# Altium PCB PrNet_v04.PcbDoc
Units mil, origin at the board's own origin, x right, y up, seen from the top; angles counter-clockwise.
Board outline 1470 x 850 mil, 2 copper layers (Top Layer, Bottom Layer); 17 components, 14 nets, 77 pads, 12 vias.
Unrouted connection lines stored in the file: 3.
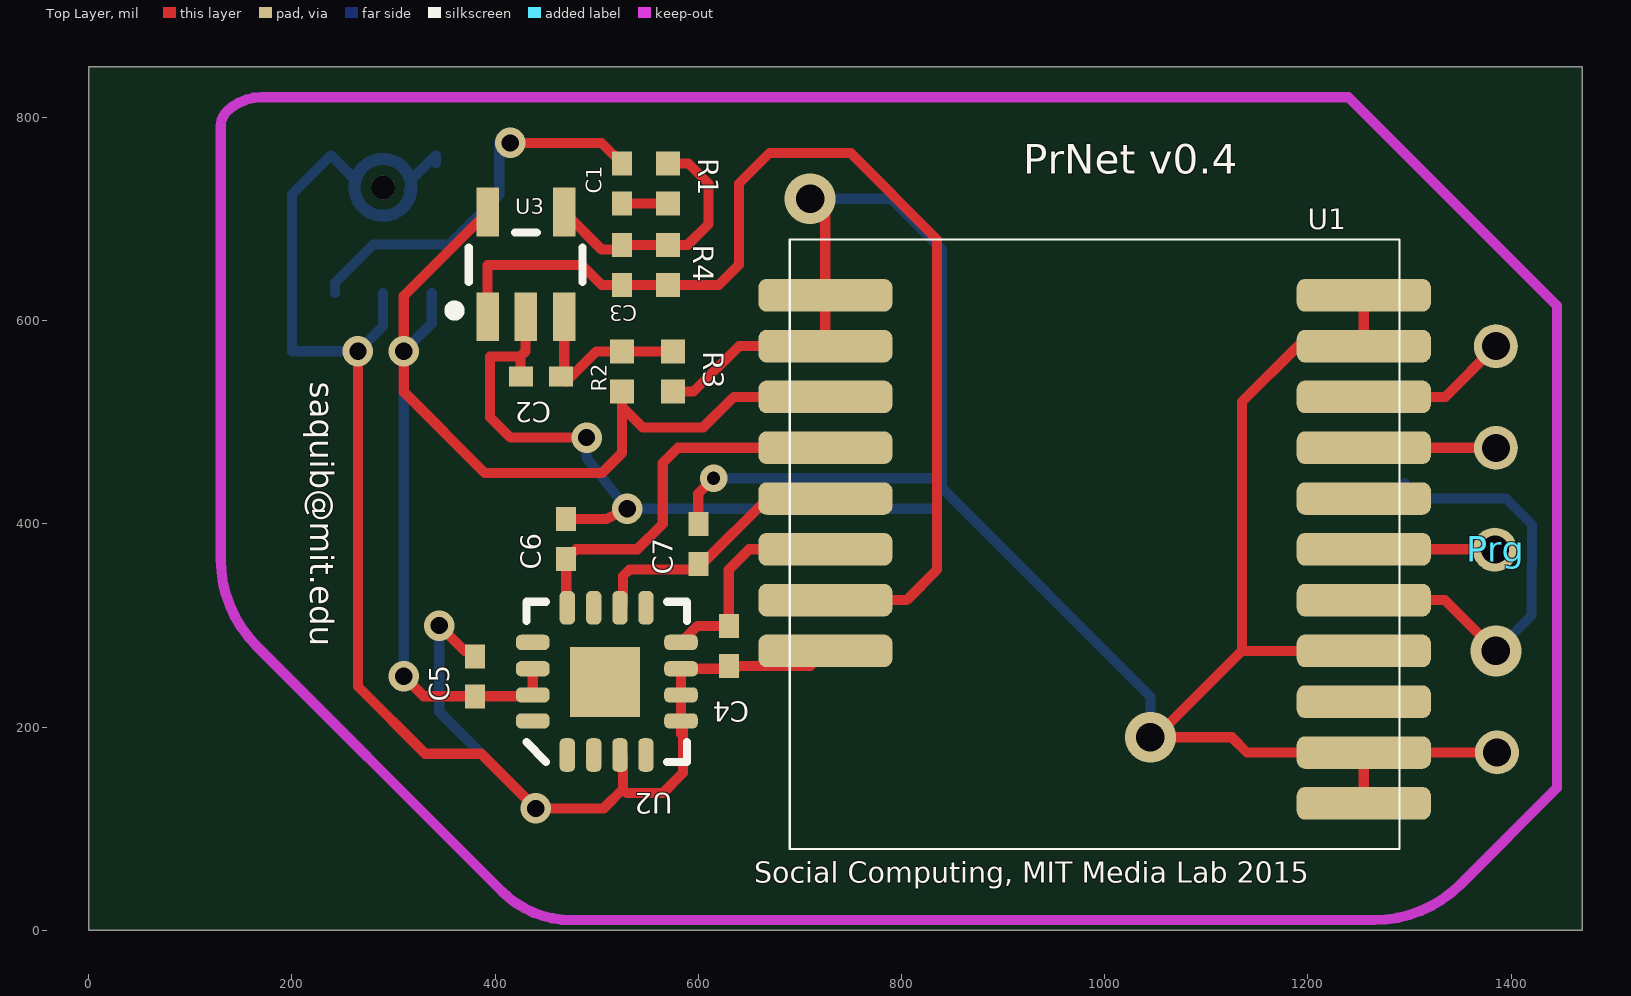
[diagram p0: Top Layer view]
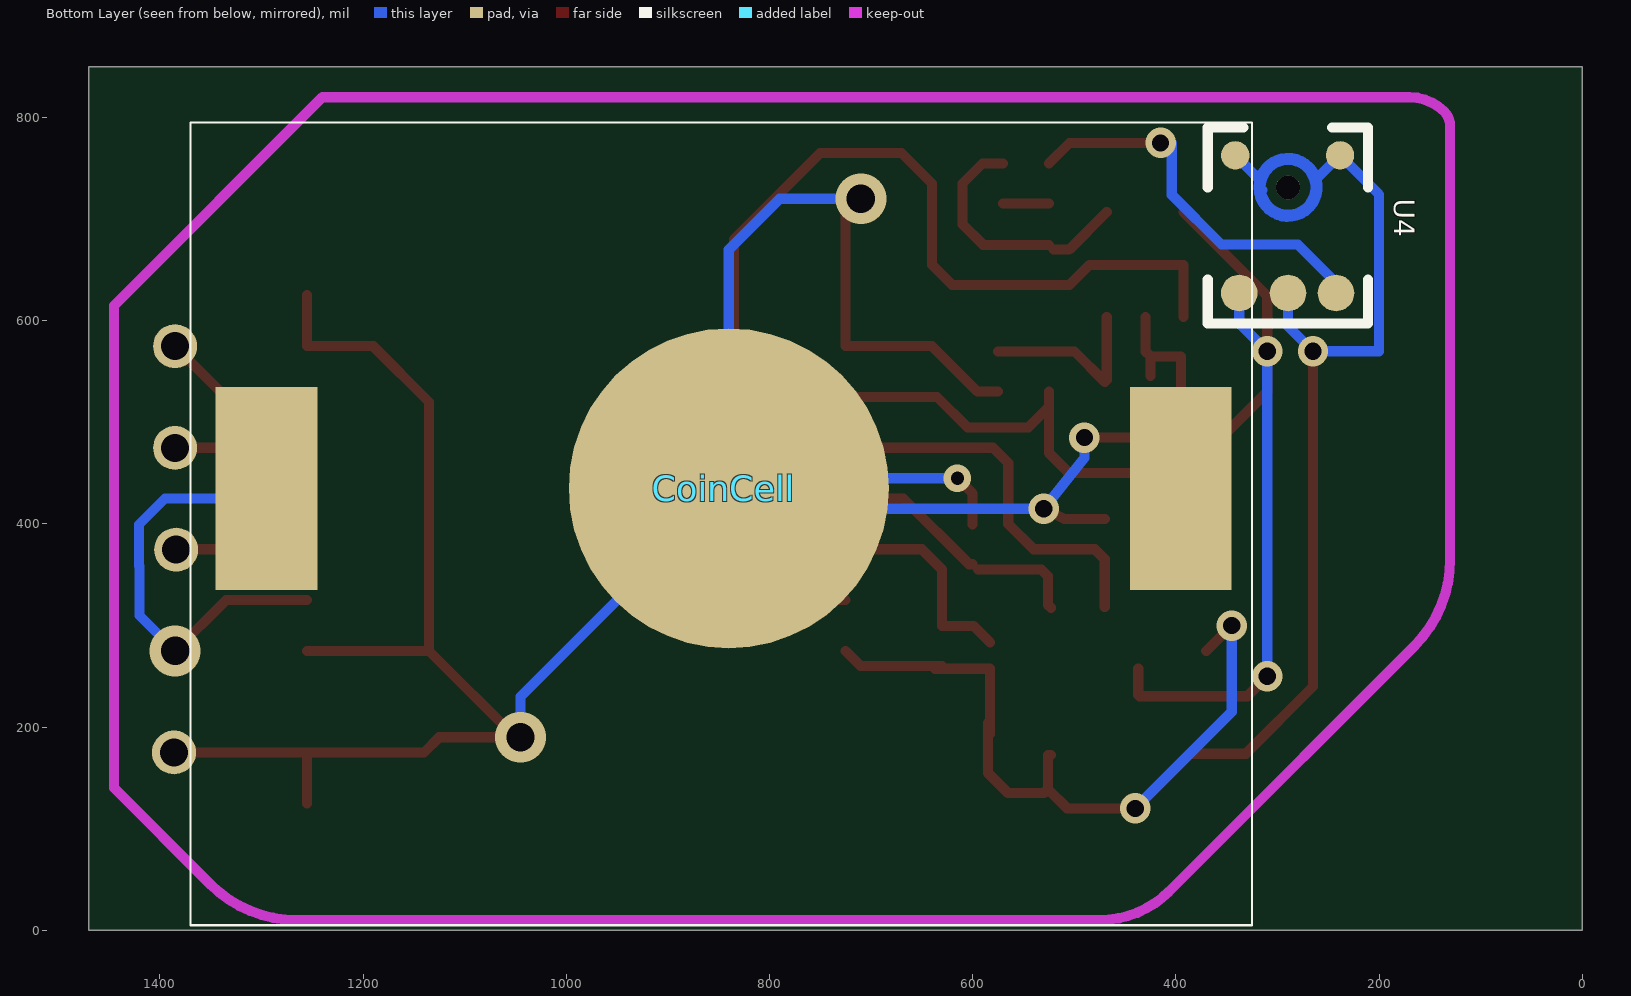
[diagram p1: Bottom Layer view, seen from below]

## Layer stack, top to bottom
Top Solder: solder mask 0.4, Solder Resist, Dk 3.5
Top Layer: signal copper 1.4
Dielectric 1: dielectric 12.6, FR-4, Dk 4.8
Bottom Layer: signal copper 1.4
Bottom Solder: solder mask 0.4, Solder Resist, Dk 3.5

## Board outline
0,0 1470,0 1470,850 0,850

## Design rules (kind name [scope] priority, off if disabled: settings)
Clearance [All] p1: gap=10
PolygonConnect [All] p1: connectstyle=Relief reliefconductorwidth=10 reliefentries=4 polygonreliefangle="90 Angle" airgapwidth=10
RoutingVias [All] p1: holewidth=28 width=50 viastyle="Through Hole" minholewidth=28 minwidth=50 maxholewidth=28 maxwidth=50
SolderMaskExpansion [All] p1: expansion=4
Width [All] p1: maxlimit=10 minlimit=10 preferedwidth=10
30 further rules are at their usual default settings.

## Components (designator, comment, footprint, x,y, rotation, side; value= is the part's Value field where it differs from the comment)
C1 "4.7uF" CAPC1005L 525,735 r270 top
C2 "1.0uF" CAPC1005L 445,545 r0 top
C3 "100pF" CAPC1005L 525,655 r90 top
C4 "0.1uF" CAPC1005L 630,280 r270 top
C5 "0.1uF" CAPC1005L 380,250 r90 top
C6 "0.1uF" CAPC1005L 470,385 r90 top
C7 "0.1uF" CAPC1005L 600,380 r90 top
CoinCell "BK-912 coin cell holder, 20 mm coin cell battery holder" CoinCell 845,435 r0 bottom
Prg "RFD programmer" PrgHeader 1385,375 r90 top
R1 "1.5K" RESC1005L 570,735 r90 top
R2 "10K" RESC1005L 525,550 r270 top
R3 "10K" RESC1005L 575,550 r90 top
R4 "100K" RESC1005L 570,655 r90 top
U1 "RFD22301 SMT module, 0.6\"x0.6\"" RFD22301 990,375 r0 top
U2 "ADXL335 accelerometer" ADXL335 510,245 r90 top
U3 "OPA344 op-amp, TI" SOT23_5 -49345,50405 r90 top
U4 "INMP401, MEMS Microphone" INMP401 290,695 r90 bottom

## Footprints (in the part's own frame and the unit in brackets; to place one, negate y for a bottom-side part, rotate by r counter-clockwise, add the part's x,y. Pads: shape width x height; smd on the part's side, far side on the other; paste and mask are expansions set on the pad)
ADXL335 [mil]
  rect 69x69 smd: 0(-0.55,1.95)
  rrect65% 33x15 smd: 1(-72.45,38.95) 2(-72.45,12.95) 3(-72.45,-12.85) 4(-72.45,-38.42) 9(72.45,-38.42) 10(72.45,-12.85) 11(72.45,12.95) 12(72.45,38.95)
  rrect65% 15x33 smd: 5(-38.94,-72.95) 6(-13.35,-72.95) 7(12.45,-72.95) 8(38.43,-72.95) 13(38.43,72.95) 14(12.45,72.95) 15(-13.35,72.95) 16(-38.92,72.95)
  silkscreen extent -79,-79 78,79
CAPC1005L [mm] "Chip Capacitor, Body 1.0x0.5mm, IPC High Density"
  rect 0.6x0.5 smd: 1(-0.5,0) 2(0.5,0)
  body extent -0.55,-0.3 0.55,0.3, height 0.6
CoinCell [mm] "coin cell holder"
  rect 2.54x5.08 smd: 1(-11.43,0) 3(11.43,0)
  round 8 smd: 2(-0.127,0)
  silkscreen extent -13.21,-9.14 13.33,10.92
INMP401 [mil]
  rrect100% 36x36 smd: 1(-67.75,-47.65) 5(-67.75,47.59) 6(-67.75,-0.41)
  rrect100% 28x28 smd: 2(67.75,51.59) 4(67.75,-51.59)
  round 23.62 hole 23.62 unplated paste+0 mask+0: 3(36.25,-0.41)
  Top Layer circle w12: c36.25,-0.41 r28
  silkscreen extent -98,-79 95,79
PrgHeader [mm] "5 pin programmer header for RFD22301"
  round 1.1 hole 0.7: 1(-5.077,-0.027) 2(-2.543,0) 3(-0.009,0.027) 4(2.537,0) 5(5.077,0)
RESC1005L [mm] "Chip Resistor, Body 1.1x0.5mm, IPC High Density"
  rect 0.6x0.6 smd: 1(-0.5,0) 2(0.5,0)
  body extent -0.55,-0.3 0.55,0.3, height 0.4
RFD22301 [mil] "RFD22301 module 0.6x0.6 inches"
  rrect50% 132x32 smd: 1(-265,250) 2(-265,200) 3(-265,150) 4(-265,100) 5(-265,50) 6(-265,0) 7(-265,-50) 8(-265,-100) 9(265,-250) 10(265,-200) 11(265,-150) 12(265,-100) 13(265,-50) 14(265,0) 15(265,50) 16(265,100) 17(265,150) 18(265,200) 19(265,250)
  silkscreen extent -300,-295 300,305
SOT23_5 [mil] "OPA344 op-amp footprint"
  rect 48x22 smd: 1(-49801.18,-49737.6) 2(-49801.18,-49775) 3(-49801.18,-49813) 4(-49698,-49813) 5(-49698,-49737.6)
  silkscreen extent -49800,-49831 -49718,-49700

## Part data
C1 C2 C3 C4 C5 C6 C7: library part "Cap Semi", "Capacitor (Semiconductor SIM Model)"
CoinCell: library part CoinCellHolder
Prg: library part Component_1
R1 R2 R3 R4: library part Res3, "Resistor"
U1: library part RFD22301_Footprint
U2: library part ADXL335
U3: library part OPA344
U4: library part INMP401

## Via types
v1: diameter 30, hole 17, Top Layer to Bottom Layer, 8 vias
v2: diameter 50, hole 28, Top Layer to Bottom Layer, 3 vias
v3: diameter 27, hole 13, Top Layer to Bottom Layer, 1 vias

## Nets (pads, with @x,y where several pads share a name; then routed paths per layer and width w, separated by ;. In a path a pad name is that pad's centre, name@x,y a point inside that pad or via, vN(x,y) a via of type N, cw(c..) or ccw(c..) an arc to the next point about the centre after c; other vN are vias at no path point)
AOUT: C1.1 U4.1 | length 377.1
  Top Layer w10: v1(415,775) 504.69,775 C1.1
  Bottom Layer w10: U4.1 242.35,637.35 280,675 355,675 403.99,723.99 v1@403.99,775
AUD: C3.1 R4.1 U1.7 U3.1 | length 1085
  Top Layer w10: U3.1 392.6,655 485,655 504.68,635.32 C3.1 R4.1 620.32,635.32 640,655 640,735 670,765 750,765 835,680 835,355 805,325 U1.7
GND: C2.1 C4.2 C5.2 C6.2 C7.2 CoinCell.2 Prg.1 R3.1 U1.1 U1.2 U1.8 U1.9 U1.10 U1.12 U1.18 U1.19 U2.3 U2.5 U2.6 U2.7 U3.2 U4.2 U4.3 U4.4 U4.6 | length 4781.1
  Top Layer w10: v1(265,570) 265,240 331.21,173.79 386.21,173.79 v1(440,120) 506.84,120 525.92,139.08 ; v1(345,300) 370,275 ; C2.1@424.82,545.5 424.82,564.82 ; U3.2 430,570 424.82,564.82 ; C6.2 509.69,404.69 v1(530,415) ; v1(490,485) 415,485 395,505 395,564.82 424.82,564.82 ; U2.3 525.92,172.55 525.92,139.08 ; R3.1 595.32,530.32 640,575 U1.2 U1.1 725,705 v2(710,720) ; 582.95,193.22 U2.5 ; C7.2 600,430 v3(615,445) ; C4.2 710.31,260.31 U1.8 ; C4.2@637.13,257.45 U2.7 U2.6 U2.5 ; v2(1045,190) 1125,190 1140,175 U1.10 ; v2@1050,190 1135,275 ; U1.9 U1.10 ; U1.12 1135,275 ; U1.19 U1.18 1190,575 1135,520 1135,275 ; Prg.1 1385.95,175 U1.10 ; 525.92,139.08 530,135 565,135 585,155 585,204.01 U2.5
  Bottom Layer w10: 260,741.16 U4.4 200,724.34 200,570 v1(265,570) 289.59,594.59 U4.6 ; 315,728.66 317.59,731.25 ; 317.59,738.75 U4.2 U4.2@341.59,755.25 ; v1(345,300) 345,215 v1(440,120) ; v1(490,485) 490,465 v1(530,415) CoinCell.2@830,415 ; v3(615,445) 835,445 840,440 840,670 790,720 v2(710,720) ; CoinCell.2 1045,230 v2(1045,190)
NetC1_2: C1.2 R1.1 | length 45
  Top Layer w10: C1.2 R1.1
NetC2_2: C2.2 R2.1 R3.2 U3.3 | length 182.3
  Top Layer w10: U3.3 468,541.69 469.84,539.84 499.68,569.68 R2.1 R3.2
NetC3_2: C3.2 R1.2 R4.2 U3.4 | length 249.2
  Top Layer w10: U3.4 505,670 C3.2@520.31,670 ; C3.2 R4.2 589.69,674.69 610,695 610,735 590.31,754.69 R1.2
RESET: Prg.3 U1.14 | length 128.6
  Top Layer w10: U1.14 Prg.3@1383.58,375
RX: Prg.5 U1.17 | length 150.7
  Top Layer w10: U1.17 1335.12,525 Prg.5
TX: Prg.4 U1.16 | length 129.9
  Top Layer w10: U1.16 Prg.4@1384.88,475
VCC: CoinCell.3 Prg.2 U1.13 | length 432.4
  Top Layer w10: U1.13 1334.88,325 Prg.2
  Bottom Layer w10: CoinCell.3@1295,440 1310,425 1395,425 1420.59,399.41 1420.59,358.87 1420,358.28 1420,309.88 Prg.2
  other v2: 1385,275
VPWM: C5.1 R2.2 U1.3 U2.14 U2.15 U3.5 U4.5 | length 1293.9
  Top Layer w10: v1(310,250) 329.68,230.32 C5.1 435.71,230.32 U2.15 U2.14 ; U3.5 310,624.4 v1(310,570) 310,530 390,450 505,450 525,470 525,515 ; R2.2 525,515 ; U1.3 635,525 605,495 545,495 525,515
  Bottom Layer w10: v1@310,255 v1(310,570) 337.59,597.59 U4.5
XOUT: C6.1 U1.4 U2.12 | length 382.4
  Top Layer w10: U2.12@470,318.5 C6.1 479.68,375 540,375 565,400 565,460 580,475 U1.4
YOUT: C7.1 U1.5 U2.10 | length 255.7
  Top Layer w10: U2.10 525.92,320.52 525.92,348.74 532.18,355 C7.1@594.68,355 ; C7.1 603.5,360.32 668.18,425 U1.5
ZOUT: C4.1 U1.6 U2.8 | length 212.4
  Top Layer w10: U2.8 599.2,299.68 C4.1 630,355 650,375 U1.6
pads on no net: CoinCell.1 U1.11 U1.15 U2.0 U2.1 U2.2 U2.4 U2.9 U2.11 U2.13 U2.16

## Keep-outs
Keep-Out Layer:
  lines w10: 130,365 ccw(c250.71,365) 165.36,279.64 384.64,60.36 406.72,38.28 ccw(c475,106.57) 475,10 1260,10 1265,10 ccw(c1265,130.71) 1350.36,45.36 1445,140 1445,615 1240,820 965,820 170,820 ccw(c170,771.72) 135.86,805.86 ccw(c150,791.72) 130,791.72 130,365

## Silkscreen, mask and mechanical layers (free items; w line width, h text height)
Top Overlay:
  text "PrNet v0.4" at 920,735 h50
  text "saquib@mit.edu" at 210,540 h40 r270
  text "Social Computing, MIT Media Lab 2015" at 655,40 h35

## Text inside footprints (layer, text, board x,y; h text height)
U2: Mechanical 16 "X" at 505.05,189.45 h31 r90; Mechanical 16 "Z" at 455.05,164.45 h31 r90; Mechanical 16 "Y" at 455.05,244.45 h31 r90; Mechanical 60 "//kentro/work/Production/AOI Parts/Patric/ADXL335.bmp" at 495.05,254.45 h1.7 r270